# Altium PCB peripheral.PCBDOC (part 2 of 4)
Units mil, origin at the board's own origin, x right, y up, seen from the top; angles counter-clockwise.
Board outline 7500 x 3963 mil, 6 copper layers (Top Layer, Internal Plane 1, MidLayer1, MidLayer2, Internal Plane 2, Bottom Layer); 212 components, 387 nets, 1676 pads, 795 vias.
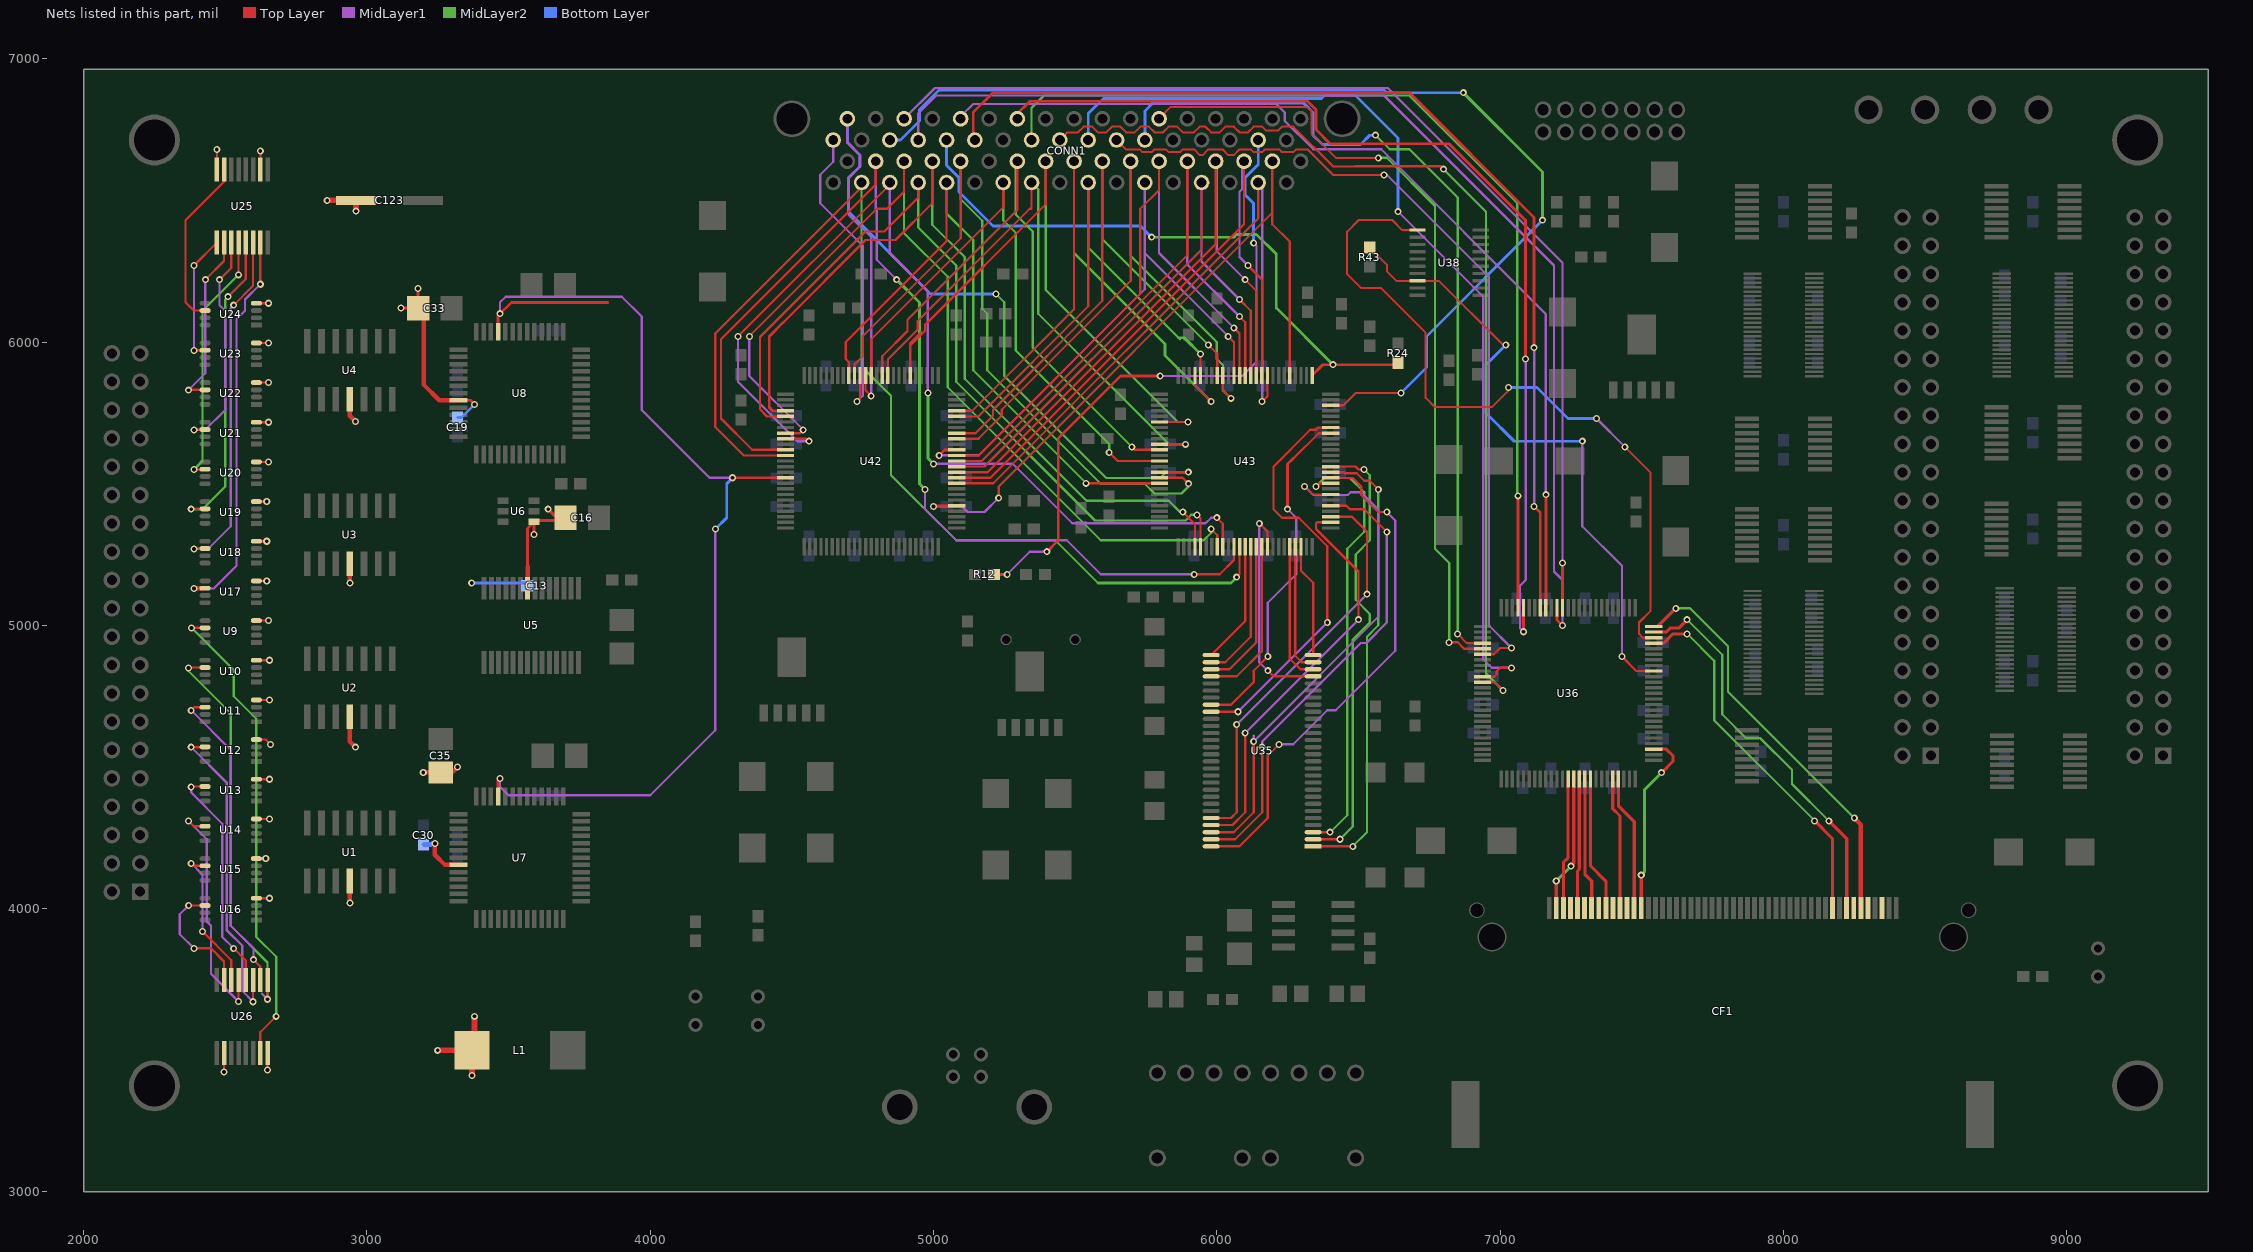
[diagram p6: the nets of this part, all layers, seen from the top]

## Via types
v1: diameter 25, hole 13.5, Top Layer to Bottom Layer, 795 vias

## Nets (pads, with @x,y where several pads share a name; then routed paths per layer and width w, separated by ;. In a path a pad name is that pad's centre, name@x,y a point inside that pad or via, vN(x,y) a via of type N, cw(c..) or ccw(c..) an arc to the next point about the centre after c; other vN are vias at no path point) (continued)
AVDD: C13.2 C16.1 C19.2 C30.2 C33.1 C35.1 C123.1 L1.2 U1.4 U2.4 U3.4 U4.4 U5.22 U6.4 U7.8 U8.8 U9.4 U10.4 U11.4 U12.4 U13.4 U14.4 U15.4 U16.4 U17.4 U18.4 U19.4 U20.4 U21.4 U22.4 U23.4 U24.4 U25.10 U25.16 U26.10 U26.16 | length 3415.6
  Top Layer w7: U25.16@2470.43,6608.94 v1(2470.43,6679.57) ; v1(2496.02,3423.98) U26.10@2496.02,3491.06 ; U25.10@2623.98,6608.94 v1(2623.98,6673.98) ; v1(2649.57,3430.43) U26.16@2649.57,3491.06
  Top Layer w8: U16.4@2610,4036.77 v1(2656.77,4036.77) ; U15.4@2610,4176.77 v1(2643.23,4176.77) ; U14.4@2610,4316.77 v1(2656.77,4316.77) ; U13.4@2610,4456.77 v1(2656.77,4456.77) ; U12.4@2610,4596.77 2643.23,4596.77 v1(2660,4580) ; U11.4@2610,4736.77 v1(2656.77,4736.77) ; U10.4@2610,4876.77 v1(2656.77,4876.77) ; U9.4@2610,5016.77 v1(2653.23,5016.77) ; U17.4@2610,5156.77 v1(2646.77,5156.77) ; U18.4@2610,5296.77 v1(2646.77,5296.77) ; U19.4@2610,5436.77 v1(2646.77,5436.77) ; U20.4@2610,5576.77 v1(2653.23,5576.77) ; U21.4@2610,5716.77 v1(2653.23,5716.77) ; U22.4@2610,5856.77 v1(2653.23,5856.77) ; U23.4@2610,5996.77 v1(2653.23,5996.77) ; U24.4@2610,6136.77 v1(2653.23,6136.77)
  Top Layer w10: v1(3120,6120) C33.1@3180.94,6120 v1(3180.94,6189.06) ; U8.8@3323.46,5794.41 3365.59,5794.41 v1(3380,5780) ; 3567.2,5207.2 3567.2,5342.17 U6.4@3590.24,5365.2 v1(3590.24,5320.24) ; U6.4@3580,5360 3590,5370 3660,5370 C16.1@3670,5380 ; v1(3640,5410) C16.1@3670,5380 ; C16.1@3700.94,5380 C16.1@3670,5380
  Top Layer w16: v1(2940,4020) U1.4@2940,4097.64 ; U2.4@2940,4677.64 2940,4590 v1(2960,4570) ; v1(2940,5150) U3.4@2940,5217.64 ; U4.4@2940,5797.64 2940,5740 v1(2960,5720) ; C33.1@3190,6100 3200,6090 3200,5850 3255.59,5794.41 U8.8@3323.46,5794.41 ; v1(3199.06,4480.94) 3300.94,4480.94 v1(3320,4500) ; v1(3240,4230) 3240,4190 3275.59,4154.41 U7.8@3323.46,4154.41 ; U5.22@3567.2,5130.91 3567.2,5207.2
  Top Layer w20: v1(2860,6500) C123.1@2961.89,6500 v1(2961.89,6461.89) ; v1(3250,3500) L1.2@3371,3500 v1(3371,3411) ; L1.2@3380,3510 v1(3380,3620)
  Bottom Layer w10: C19.2@3320,5733.46 3333.46,5733.46 v1(3380,5780) ; v1(3370,5150) 3570,5150 C13.2@3570,5140
  Bottom Layer w16: C30.2@3200,4226.54 3226.54,4226.54 3230,4230 v1(3240,4230)
BCLK: CONN1.57 U36.79 | length 3071.7
  Top Layer w7: v1(6850,4970) 6882.83,4937.17 U36.79@6937.83,4937.17
  MidLayer2 w8: v1(6560,6730) 6610,6680 6680,6680 6850,6510 v1(6850,4970)
  Bottom Layer w10: CONN1.57@5746,6713 5746,6816 5773,6843 6307,6843 6340,6810 6340,6730 6372.96,6697.04 6507.04,6697.04 6540,6730 v1(6560,6730)
BDIN: CONN1.51 U36.86 | length 3557
  Top Layer w7: CONN1.51@5446,6713 5473,6740 5510,6740 5530,6760 5560,6760 5580,6740 5610,6740 5630,6760 5660,6760 5680,6740 5710,6740 5730,6760 5760,6760 5780,6740 5810,6740 5830,6760 5860,6760 5880,6740 5919.26,6740 5939.26,6760 5960,6760 5980,6740 6010,6740 6030,6760 6060,6760 6080,6740 6110,6740 6130,6760 6160,6760 6172.94,6747.06 6217.06,6747.06 6230,6760 6270,6760 6410,6620 6490,6620
  Top Layer w8: 6490,6620 6790,6620 v1(6800,6610) ; U36.86@6937.83,4799.37 6980.63,4799.37 v1(7010,4770)
  MidLayer2 w8: v1(6800,6610) 6950,6460 6950,4830 v1(7010,4770)
BDONE: CONN1.58 U36.80 | length 2870
  Top Layer w7: CONN1.58@5796,6788 5838,6830 6318.08,6830 6334.5,6813.58 6334.5,6735.5 6420,6650 v1(6570,6650)
  Top Layer w8: v1(6820,4940) 6850,4940 6872.52,4917.48 U36.80@6937.83,4917.48
  MidLayer2 w8: v1(6570,6650) 6600,6650 6770,6480 6770,5270 6820,5220 v1(6820,4940)
BINIT: CONN1.53 U36.85 | length 3473.2
  Top Layer w8: U36.85@6937.83,4819.06 6979.06,4819.06 6987.85,4827.85 6987.85,4837.85 7000,4850 v1(7040,4850)
  MidLayer1 w8: v1(6640,6460) 6940,6160 6940,4880 6970,4850 v1(7040,4850)
  Bottom Layer w10: CONN1.53@5546,6713 5546,6806 5600,6860 6370,6860 6380,6870 6490,6870 6640,6720 v1(6640,6460)
BIO0: CONN1.40 U36.64 | length 3842.7
  Top Layer w10: 7220,5110 v1(7220,5220) ; U36.64@7220.31,5062.17 7220.31,5110
  MidLayer1 w8: CONN1.40@4896,6788 5005,6897 6603,6897 7220.31,6279.69 ; v1@7220,5220.31 7220,6280
BIO1: CONN1.41 U36.65 | length 3964.7
  Top Layer w10: U36.65@7200.63,5062.17 7200.63,5019.37 v1(7220,5000)
  MidLayer1 w8: CONN1.41@4946,6713 4946,6806 5010,6870 6590,6870 7190,6270 7190,5190 7220,5160 v1(7220,5000)
BIO2: CONN1.44 U36.67 | length 3440.8
  Top Layer w10: U36.67@7161.26,5062.17 v1(7161.26,5461.26)
  MidLayer1 w8: CONN1.44@5100,6800 5140,6840 6210,6840 6240,6810 6240,6780 6340,6680 6580,6680 7161.26,6098.74 v1(7161.26,5461.26) v1@7160,5462.52
BIO3: CONN1.45 U36.68 | length 3677.5
  Top Layer w10: CONN1.45@5146,6713 5140,6719 5140,6810 5210,6880 6680,6880 7120,6440 v1(7120,5980) ; v1(7120,5420) 7141.57,5398.43 U36.68@7141.57,5062.17
  MidLayer1 w8: v1(7120,5420) v1(7120,5980)
BIO4: CONN1.48 U36.71 | length 3586.4
  Top Layer w10: CONN1.48@5290,6800 5340,6850 6320,6850 6350,6820 6350,6750 6400,6700 6820,6700 7090,6430 v1(7090,5940) ; v1(7082.52,4977.48) U36.71@7082.52,5062.17
  MidLayer1 w8: v1(7082.52,4977.48) 7070,4990 7070,5140 7090,5160 v1(7090,5940)
BIO5: CONN1.49 U36.72 | length 3431.6
  Top Layer w10: U36.72@7062.83,5062.17 v1(7062.83,5457.17)
  MidLayer2 w8: CONN1.49@5346,6713 5346,6826 5390,6870 6680,6870 7060,6490 7060,5460 v1(7062.83,5457.17)
BPROG: CONN1.55 U36.81 | length 3044.8
  Top Layer w7: CONN1.55@5646,6713 5679,6680 5727.16,6680 5737.16,6670 5770,6670 5780,6680 5820,6680 5830,6670 5870,6670 5880,6680 5920,6680 5940,6660 5950,6660 5970,6680 6020,6680 6040,6660 6060,6660 6080,6680 6120,6680 6130,6670 6160,6670 6170,6680 6220,6680 6230,6670 6270,6670 6280,6680 6320,6680 6410,6590 v1(6590,6590)
  Top Layer w8: U36.81@6937.83,4897.8 6977.8,4897.8 7000,4920 v1(7040,4920)
  MidLayer1 w8: v1@6580,6590 6600,6590 6960,6230 6960,5000 v1(7040,4920)
CCLK: CONN1.52 R25.1 | length 1516.9
  Top Layer w10: v1(6260,6400) 6540,6120 R25.1@6540,6053.46
  MidLayer2 w10: CONN1.52@5496,6788 5496,6693.16 5519.16,6670 5570,6670 5590,6690 5610,6690 5640,6660 5650,6660 5670,6680 5720,6680 5750,6650 5750,6620 5800,6570 5800,6530 5840,6490 6170,6490 v1(6260,6400)
CCLK: CONN1.65 R12.1 | length 2266.7
  Top Layer w10: R12.1@5213.46,5180 v1(5260,5180) ; v1(5400,5260) 5440,5300 5440,5660 5660,5880 v1(5800,5880)
  MidLayer1 w8: v1(5260,5180) 5340,5260 v1(5400,5260) ; v1(5800,5880) 6090,5880 6140,5930 6140,6340 v1(6130,6350)
  Bottom Layer w10: v1(6130,6350) 6130,6490 6100,6520 6100,6580 6146,6626 CONN1.65@6146,6713
CD1: CF1.26 U36.14 | length 481
  Top Layer w11: CF1.26@7198.13,4002.36 v1(7198.13,4098.13) ; v1(7250,4150) 7259.69,4159.69 U36.14@7259.69,4457.83
  MidLayer2 w10: v1(7198.13,4098.13) v1(7250,4150)
CE1: CF1.7 U36.22 | length 478.7
  Top Layer w11: U36.22@7417.17,4457.83 7417.17,4362.83 7473.13,4306.87 CF1.7@7473.13,4002.36
CE2: CF1.32 U36.28 | length 661.4
  Top Layer w11: CF1.32@7498.13,4002.36 v1(7498.13,4118.13) ; U36.28@7542.17,4563.15 7586.85,4563.15 7610,4540 7610,4520 v1(7570,4480)
  MidLayer2 w10: v1(7498.13,4118.13) 7510,4130 7510,4420 v1(7570,4480)
CTL0: U35.36 U43.43 | length 1224.4
  Top Layer w8: U35.36@5980,4720 6050,4720 6130,4800 6130,4840 v1(6180,4890) ; 6270.56,5589.44 6359.54,5678.43 U43.43@6402.17,5678.43
  Top Layer w10: v1(6250,5410) 6250,5570 6270,5590
  MidLayer1 w8: v1(6180,4890) 6180,5080 6280,5180 6280,5380 v1(6250,5410)
CTL1: U35.37 U43.44 | length 1463
  Top Layer w8: U35.37@5980,4695 v1(6075,4695) ; v1(6390,5010) 6390,5278.79 6288.79,5380 6230,5380 6200,5410 6200,5560 6330,5690 6350,5690 6358.11,5698.11 U43.44@6402.17,5698.11
  MidLayer1 w8: v1(6075,4695) v1(6390,5010)
D0: CF1.21 U36.47 | length 1311.6
  Top Layer w11: U36.47@7542.17,4937.17 7577.17,4937.17 7610,4970 v1(7660,4970) ; v1(8110,4310) 8173.13,4246.87 CF1.21@8173.13,4002.36
  MidLayer2 w8: v1(7660,4970) 7755.39,4874.61 7755.39,4664.61 v1(8110,4310)
D1: CF1.22 U36.49 | length 1416
  Top Layer w11: U36.49@7542.17,4976.54 7586.54,4976.54 7600,4990 7630,4990 v1(7660,5020) ; v1(8160,4310) 8223.13,4246.87 CF1.22@8223.13,4002.36
  MidLayer2 w8: v1(7660,5020) 7783.46,4896.54 7783.46,4686.54 7867.22,4602.78 7917.22,4602.78 8030,4490 8030,4440 v1(8160,4310)
D2: CF1.23 U36.50 | length 1461.7
  Top Layer w11: U36.50@7542.17,4996.22 7556.22,4996.22 v1(7620,5060)
  Top Layer w16: v1(8250,4320) 8273.13,4296.87 CF1.23@8273.13,4002.36
  MidLayer2 w8: v1(7620,5060) 7670,5060 7804.16,4925.84 7804.16,4765.84 v1(8250,4320)
D3: CF1.2 U36.13 | length 462.5
  Top Layer w11: CF1.2@7223.13,4002.36 7223.13,4163.13 7240,4180 U36.13@7240,4457.83
D4: CF1.3 U36.15 | length 458.1
  Top Layer w11: CF1.3@7273.13,4002.36 7273.13,4133.13 7279.37,4139.37 U36.15@7279.37,4457.83
D5: CF1.4 U36.16 | length 465.4
  Top Layer w11: U36.16@7299.06,4457.83 7299.06,4120.94 7323.13,4096.87 CF1.4@7323.13,4002.36
D6: CF1.5 U36.17 | length 478
  Top Layer w11: U36.17@7318.74,4457.83 7318.74,4151.26 7373.13,4096.87 CF1.5@7373.13,4002.36
D7: CF1.6 U36.21 | length 466.1
  Top Layer w11: U36.21@7397.48,4457.83 7397.48,4352.52 7423.13,4326.87 CF1.6@7423.13,4002.36
D8: CF1.47
D9: CF1.48
D10: CF1.49
D11: CF1.27
D12: CF1.28
D13: CF1.29
D14: CF1.30
D15: CF1.31
DACCLK: U7.49 U8.49 U42.16 | length 3857.1
  Top Layer w10: U7.49@3463.23,4396.54 3463.23,4453.23 v1(3470,4460) ; U8.49@3463.23,6036.54 3463.23,6093.23 3510,6140 3850,6140 ; v1(4290.94,5520.94) U42.16@4477.83,5520.94
  MidLayer1 w8: v1(3470,4460) 3470,4430 3500,4400 4000,4400 4230,4630 v1(4230,5340) ; v1(3470,6100) 3470,6140 3490,6160 3900,6160 3970,6090 3970,5760 4209.06,5520.94 v1(4290.94,5520.94)
  Bottom Layer w10: v1(4230,5340) 4270,5380 4270,5500 v1(4290.94,5520.94)
DIN: CONN1.63 U42.48 | length 2246.3
  Top Layer w8: U42.48@4976.85,5277.83 4976.85,5313.15 4940,5350 4940,5740 5040,5840 5040,5860 5150,5970 5150,6030 5160,6040 5300,6040 v1(5320,6060)
  MidLayer2 w10: v1(5860,6400) v1(6040,6400)
  Bottom Layer w10: v1(5320,6060) 5420,6060 5650,6290 5750,6290 v1(5860,6400) ; v1(6040,6400) 6000,6440 6000,6580 6046,6626 CONN1.63@6046,6713
DIN: CONN1.39 U43.48 | length 3773.7
  Top Layer w8: U43.48@6402.17,5776.85 6446.85,5776.85 6490,5820 v1(6650,5820)
  MidLayer2 w10: v1(6870,6880) 7150,6600 v1(7150,6430)
  Bottom Layer w10: CONN1.39@4846,6713 4883,6713 4950,6780 4950,6820 5020,6890 6590,6890 6600,6880 v1(6870,6880) ; v1(6650,5820) 6740,5910 6740,6020 v1(7150,6430)
DONE: CONN1.66 R11.1 U42.51 | length 2967.5
  Top Layer w8: U42.51@5082.17,5343.78 5082.17,5051.3 R11.1@5120,5013.46 v1(5423.46,5013.46)
  MidLayer1 w8: v1(5470,5950) 5680,6160 5680,6510 5690,6520 5690,6570 5740,6620 5740,6650 5770,6680 5820,6680 5830,6670 5870,6670 5880,6680 5926.17,6680 5936.17,6670 5960,6670 5970,6680 6026.17,6680 6036.17,6670 6070,6670 6100,6700 6100,6730 6160,6790 CONN1.66@6190,6790
  Bottom Layer w10: v1(5423.46,5013.46) 5470,5060 v1(5470,5950)
DONE: CONN1.43 R24.1 U43.51 | length 2207.1
  Top Layer w10: U43.51@6336.22,5882.17 6374.06,5920 6620,5920 R24.1@6630,5930
  MidLayer2 w10: v1(5770,6370) 6060,6370 6070,6380 6140,6380 6210,6310 6210,6120 v1(6410,5920)
  Bottom Layer w10: CONN1.43@5046,6713 5046,6624 5090,6580 5090,6530 5210,6410 5730,6410 v1(5770,6370)
DSEL0: U16.6 U26.7 | length 432.7
  Top Layer w8: v1(2371.18,4011.18) U16.6@2428.9,4011.18 ; v1(2390,3860) 2450,3860 2496.02,3813.98 U26.7@2496.02,3748.94
  MidLayer1 w8: v1(2371.18,4011.18) 2340,3980 2340,3910 v1(2390,3860)
DSEL1: U15.6 U26.6 | length 522.3
  Top Layer w8: v1(2380,4160) 2388.82,4151.18 U15.6@2428.9,4151.18 ; v1(2420,3920) 2521.61,3818.39 U26.6@2521.61,3748.94
  MidLayer1 w8: v1(2380,4160) 2420,4120 v1(2420,3920)
DSEL2: U14.6 U26.5 | length 853.4
  Top Layer w8: v1(2370,4310) 2388.82,4291.18 U14.6@2428.9,4291.18 ; v1(2547.21,3672.8) U26.5@2547.21,3748.94
  MidLayer1 w8: v1(2370,4310) 2435,4245 2435,3955 2450,3940 2450,3770 v1(2547.21,3672.8)
DSEL3: U13.6 U26.4 | length 810.3
  Top Layer w8: v1(2380,4430) 2381.18,4431.18 U13.6@2428.9,4431.18 ; v1(2530,3860) 2572.8,3817.21 U26.4@2572.8,3748.94
  MidLayer1 w8: v1(2380,4430) 2380,4410 2490,4300 2490,3900 v1(2530,3860)
DSEL4: U12.6 U26.3 | length 1115.6
  Top Layer w8: v1(2380,4570) 2427.72,4570 U12.6@2428.9,4571.18 ; v1(2598.39,3671.61) U26.3@2598.39,3748.94
  MidLayer1 w8: v1(2380,4570) 2505,4445 2505,3925 2560,3870 2560,3710 v1(2598.39,3671.61)
DSEL5: U11.6 U26.2 | length 1105.6
  Top Layer w8: v1(2380,4700) 2391.18,4711.18 U11.6@2428.9,4711.18 ; v1(2600,3820) 2623.98,3796.02 U26.2@2623.98,3748.94
  MidLayer1 w8: v1(2380,4700) 2520,4560 2520,3940 2600,3860 v1(2600,3820)
DSEL6: U10.6 U26.1 | length 1440.9
  Top Layer w8: v1(2370,4850) 2371.18,4851.18 U10.6@2428.9,4851.18 ; v1(2649.57,3680.43) U26.1@2649.57,3748.94
  MidLayer1 w8: 2630,3700 v1(2649.57,3680.43)
  MidLayer2 w8: v1(2370,4850) 2370,4840 2520,4690 2520,3940 2649.57,3810.43 v1(2649.57,3680.43)
DSEL7: U9.6 U26.15 | length 1694.8
  Top Layer w8: v1(2381.18,4991.18) U9.6@2428.9,4991.18 ; U26.15@2623.98,3491.06 2623.98,3563.98 v1(2680,3620)
  MidLayer2 w8: v1(2381.18,4991.18) 2530,4842.36 2530,4750 2610,4670 2610,3900 2680,3830 v1(2680,3620)
DSEL8: U17.6 U25.7 | length 1398.4
  Top Layer w8: v1(2623.98,6203.98) U25.7@2623.98,6351.06
  Top Layer w16: v1(2390,5130) 2391.18,5131.18 U17.6@2428.9,5131.18
  MidLayer1 w8: v1(2390,5130) 2460,5130 2540,5210 2540,6080 2570,6110 2570,6150 v1(2623.98,6203.98)
DSEL9: U18.6 U25.6 | length 1246.7
  Top Layer w8: v1(2390,5270) U18.6@2440,5270 ; v1(2530,6130) 2598.39,6198.39 U25.6@2598.39,6351.06
  MidLayer1 w8: v1(2390,5270) 2440,5270 2520,5350 2520,6120 v1(2530,6130)
DSEL10: U19.6 U25.5 | length 1093.7
  Top Layer w8: v1(2380,5410) 2381.18,5411.18 U19.6@2428.9,5411.18 ; v1(2510,6160) 2572.8,6222.8 U25.5@2572.8,6351.06
  MidLayer2 w8: v1(2380,5410) 2420,5410 2500,5490 2500,6150 v1(2510,6160)
DSEL11: U20.6 U25.4 | length 903.9
  Top Layer w8: v1(2390,5550) U20.6@2427.72,5550 ; v1(2547.21,6237.21) U25.4@2547.21,6351.06
  MidLayer2 w8: v1(2390,5550) 2420,5580 2420,6110 v1(2547.21,6237.21)
DSEL12: U21.6 U25.3 | length 795
  Top Layer w8: v1(2390,5690) 2391.18,5691.18 U21.6@2428.9,5691.18 ; v1(2480,6220) 2521.61,6261.61 U25.3@2521.61,6351.06
  MidLayer1 w8: v1(2390,5690) 2430,5690 2500,5760 2500,6110 2480,6130 v1(2480,6220)
DSEL13: U22.6 U25.2 | length 632.7
  Top Layer w8: v1(2370,5830) 2371.18,5831.18 U22.6@2428.9,5831.18 ; v1(2430,6220) 2496.02,6286.02 U25.2@2496.02,6351.06
  MidLayer1 w8: v1(2370,5830) 2430,5890 v1(2430,6220)
DSEL14: U23.6 U25.1 | length 453.8
  Top Layer w8: v1(2390,5970) 2391.18,5971.18 U23.6@2428.9,5971.18 ; v1(2390,6270) 2470.43,6350.43 U25.1@2470.43,6351.06
  MidLayer1 w8: v1(2390,5970) v1(2390,6270)
DSEL15: U24.6 U25.15 | length 606.1
  Top Layer w8: U24.6@2428.9,6111.18 2388.82,6111.18 2360,6140 2360,6430 2496.02,6566.02 U25.15@2496.02,6608.94
EADDR0: CONN1.10 U42.91 U43.91 | length 2717.1
  Top Layer w8: U42.91@4720.94,5882.17 4720.94,5920.94 4750,5950 4750,6020 5096,6366 CONN1.10@5096,6638 ; U43.91@5797.83,5520.94 5879.06,5520.94 v1(5900,5500)
  MidLayer2 w8: CONN1.10@5096,6638 5096,6504 5172.15,6427.85 5172.15,6117.85 5190,6100 5190,5900 5590,5500 5745.85,5500 5780.24,5465.6 5875.6,5465.6 5900,5490 v1@5900,5508.11
EADDR1: CONN1.9 U42.92 U43.92 | length 2357.9
  Top Layer w8: U42.92@4701.26,5882.17 4701.26,5928.74 4690,5940 4690,6000 5046,6356 CONN1.9@5046,6563 ; v1(5538.74,5501.26) U43.92@5797.83,5501.26
  MidLayer2 w8: CONN1.9@5046,6563 5046,6454 5140,6360 5140,5900 v1(5538.74,5501.26)
EADDR2: CONN1.8 U42.4 U43.4 | length 3151.6
  Top Layer w8: 4468.34,6068.34 4760,6360 4866,6360 4996,6490 CONN1.8@4996,6638 ; v1(5880,5400) 5922.83,5357.17 U43.4@5922.83,5277.83
  Top Layer w10: 4468.34,6068.34 4420,6020 4420,5770 4432.83,5757.17 U42.4@4477.83,5757.17
  MidLayer2 w8: CONN1.8@4996,6638 4996,6414 5110,6300 5110,5870 5540,5440 5830,5440 5870,5400 v1(5880,5400)
EADDR3: CONN1.7 U42.5 U43.5 | length 3108.2
  Top Layer w8: U42.5@4477.83,5737.48 4412.52,5737.48 4387.61,5762.39 4387.61,6017.61 4760,6390 4826,6390 4946,6510 CONN1.7@4946,6563 ; v1(5930,5390) 5942.52,5377.48 U43.5@5942.52,5277.83
  MidLayer2 w8: CONN1.7@4946,6563 4946,6404 5080,6270 5080,5860 5570,5370 5890,5370 5910,5390 v1(5930,5390)
EADDR4: CONN1.6 U42.8 U43.8 | length 3451.7
  Top Layer w8: v1(4350,6020) 4800,6470 4836,6470 4896,6530 CONN1.6@4896,6638 ; U42.8@4477.83,5678.43 4528.43,5678.43 v1(4540,5690) ; v1(5980,5340) 6001.57,5318.43 U43.8@6001.57,5277.83
  MidLayer1 w8: v1(4350,6020) 4350,5880 v1(4540,5690)
  MidLayer2 w8: CONN1.6@4896,6638 4896,6384 5050,6230 5050,5840 5590,5300 5953.15,5300 5980,5326.85 v1(5980,5340)
EADDR5: CONN1.5 U42.9 U43.9 | length 3614.3
  Top Layer w8: v1(4310,6020) 4840,6550 4846,6550 CONN1.5@4846,6563 ; U42.9@4477.83,5658.74 4551.26,5658.74 v1(4560,5650) ; v1(6000,5380) 6021.26,5358.74 U43.9@6021.26,5277.83
  MidLayer1 w8: v1(4310,6020) 4310,5860 4520,5650 v1(4560,5650) ; CONN1.5@4846,6563 4846,6314 4980,6180 v1(4980,5820) ; v1(5000,5570) 5280,5570 5490,5360 5960,5360 5980,5380 v1(6000,5380)
  MidLayer2 w10: v1(4980,5820) 4980,5590 v1(5000,5570)
EADDR6: CONN1.4 U42.11 U43.11 | length 3962
  Top Layer w8: U42.11@4477.83,5619.37 4360.63,5619.37 4250,5730 4250,6010 4796,6556 CONN1.4@4796,6638 ; v1(5920,5180) 6010,5180 6060.63,5230.63 U43.11@6060.63,5277.83
  MidLayer1 w8: CONN1.4@4796,6638 4796,6470 4800,6466 4800,6290 v1(4870,6220) ; v1(4970,5480) 4970,5410 5080,5300 5470,5300 5590,5180 v1(5920,5180)
  MidLayer2 w10: v1(4870,6220) 4950,6140 4950,5500 v1(4970,5480)
EADDR7: CONN1.3 U42.12 U43.12 | length 3940
  Top Layer w8: U42.12@4477.83,5599.69 4330.31,5599.69 4230,5700 4230,6030 4746,6546 CONN1.3@4746,6563 ; v1(6070,5170) 6080.31,5180.31 U43.12@6080.31,5277.83
  MidLayer2 w8: CONN1.3@4746,6563 4746,5914 4850,5810 4850,5530 5080,5300 5430,5300 5580,5150
  MidLayer2 w10: 5580,5150 6050,5150 v1(6070,5170)
EDATA0: CONN1.32 U42.55 U43.55 | length 2529.6
  Top Layer w8: v1(5000,5420) 5002.52,5422.52 U42.55@5082.17,5422.52 ; v1(5230,5450) 5230,5490 6196,6456 ; CONN1.32@6196,6638 6196,6416 6257.48,6354.52 U43.55@6257.48,5882.17
  MidLayer1 w8: v1(5000,5420) 5100,5420 5120,5400 5180,5400 v1(5230,5450)
EDATA1: CONN1.31 U42.59 U43.59 | length 2456.7
  Top Layer w8: U42.59@5082.17,5501.26 5211.26,5501.26 6146,6436 CONN1.31@6146,6563 ; v1(6160,5790) 6178.74,5808.74 U43.59@6178.74,5882.17
  MidLayer1 w8: CONN1.31@6146,6563 6160,6549 v1(6160,5790)
EDATA2: CONN1.30 U42.60 U43.60 | length 2403.8
  Top Layer w8: U42.60@5082.17,5520.94 5200.94,5520.94 6096,6416 CONN1.30@6096,6638 ; v1(6110,6270) 6159.06,6220.94 U43.60@6159.06,5882.17
  MidLayer1 w8: CONN1.30@6096,6638 6096,6636 6090,6630 6090,6540 6080,6530 6080,6300 v1(6110,6270) ; CONN1.30@6100,6638 CONN1.30@6100,6640
EDATA3: CONN1.28 U42.61 U43.61 | length 2365
  Top Layer w8: U42.61@5082.17,5540.63 5190.63,5540.63 5996,6346 CONN1.28@5996,6638 ; v1(6100,6220) 6139.37,6180.63 U43.61@6139.37,5882.17
  MidLayer1 w8: CONN1.28@6000,6650 6000,6320 v1(6100,6220)
EDATA4: CONN1.27 U42.62 U43.62 | length 2170.8
  Top Layer w8: U42.62@5082.17,5560.32 5180.32,5560.32 5946,6326 CONN1.27@5946,6563 ; v1(6080,6150) 6119.69,6110.32 U43.62@6119.69,5882.17
  MidLayer1 w8: CONN1.27@5946,6563 5946,6284 v1(6080,6150)
EDATA5: CONN1.26 U42.63 U43.63 | length 2286.9
  Top Layer w8: U42.63@5082.17,5580 5170,5580 5896,6306 CONN1.26@5896,6638 ; v1(6080,6090) 6100,6070 U43.63@6100,5882.17
  MidLayer1 w8: CONN1.26@5896,6638 5896,6274 v1(6080,6090)
EDATA6: CONN1.24 U42.64 U43.64 | length 2253
  Top Layer w8: U42.64@5082.17,5599.69 5159.69,5599.69 5730,6170 5730,6470 5796,6536 CONN1.24@5796,6638 ; v1(6060,6050) 6080.31,6029.69 U43.64@6080.31,5882.17
  MidLayer1 w8: CONN1.24@5796,6638 5796,6314 v1(6060,6050)
EDATA7: CONN1.23 U42.65 U43.65 | length 1978.1
  Top Layer w8: v1(6040,6020) 6060.63,5999.37 U43.65@6060.63,5882.17
  Top Layer w10: v1(5020,5600) 5039.37,5619.37 U42.65@5082.17,5619.37
  MidLayer1 w8: v1(5020,5600) 5160,5600 5746,6186 CONN1.23@5746,6563 ; 5746,6314 v1(6040,6020)
EDATA8: CONN1.22 U42.67 U43.67 | length 2356
  Top Layer w8: U42.67@5082.17,5658.74 5160,5658.74 5160,5660 5240.69,5740.69 5240.69,5760.69 5696,6216 CONN1.22@5696,6638 ; U43.67@6021.26,5882.17 6021.26,5830.01 v1(6050,5801.27)
  MidLayer2 w8: CONN1.22@5696,6638 5696,6304 6000,6000 6000,5940 6022.15,5917.85 6022.15,5827.85 6048.73,5801.27 v1(6050,5801.27)
EDATA9: CONN1.20 U42.68 U43.68 | length 2135.1
  Top Layer w8: U42.68@5082.17,5678.43 5148.43,5678.43 5210,5740 5210,5760 5596,6146 CONN1.20@5596,6638 ; v1(5970,5990) 6001.57,5958.43 U43.68@6001.57,5882.17
  MidLayer2 w8: CONN1.20@5596,6638 5596,6364 v1(5970,5990)
EDATA10: CONN1.19 U42.71 U43.71 | length 1926
  Top Layer w8: U42.71@5082.17,5737.48 5157.48,5737.48 5546,6126 CONN1.19@5546,6563 ; U43.71@5942.52,5882.17 v1(5942.52,5957.48)
  MidLayer2 w8: CONN1.19@5546,6563 5546,6334 5870,6010
  MidLayer2 w10: 5864.76,6015.24 5884.76,6015.24 v1(5942.52,5957.48)
EDATA11: CONN1.18 U42.72 U43.72 | length 2248.8
  Top Layer w8: U42.72@5082.17,5757.17 5137.17,5757.17 5496,6116 CONN1.18@5496,6638 ; U43.72@5922.83,5882.17 5922.83,5847.17 v1(5980,5790)
  MidLayer2 w8: CONN1.18@5496,6638 5496,6314 5817.16,5992.84
  MidLayer2 w10: 5817.16,5992.84 5817.16,5952.84 v1(5980,5790)
EDATA12: CONN1.16 U42.81 U43.81 | length 2264.7
  Top Layer w8: U42.81@4917.8,5882.17 4917.8,5996.58 4955.39,6034.17 ; 4917.8,5987.8 4970,6040 4970,6060 5396,6486 CONN1.16@5396,6638 ; U43.81@5797.83,5717.8 v1(5897.8,5717.8)
  MidLayer2 w8: CONN1.16@5396,6638 5396,6184 5862.2,5717.8 v1(5897.8,5717.8)
EDATA13: CONN1.15 U42.85 U43.85 | length 2167.7
  Top Layer w8: U42.85@4839.06,5882.17 4839.06,5939.06 ; 4840,5940 4944.59,6044.59 4944.59,6074.59 5340,6470 5346,6470 CONN1.15@5346,6563 ; U43.85@5797.83,5639.06 v1(5889.06,5639.06)
  MidLayer2 w8: CONN1.15@5346,6563 5370,6539 5370,6100 5830,5640 5830,5639.06 v1(5889.06,5639.06)
EDATA14: CONN1.14 U42.86 U43.86 | length 2235.8
  Top Layer w8: U42.86@4819.37,5882.17 4819.37,5949.37 4908.61,6038.61 4908.61,6078.61 5296,6466 CONN1.14@5296,6638 ; v1(5700,5630) 5710.63,5619.37 U43.86@5797.83,5619.37
  MidLayer2 w8: CONN1.14@5296,6638 5290,6632 5290,6450 5350,6390 5350,5980 v1(5700,5630)
EDATA15: CONN1.13 U42.88 U43.88 | length 2172
  Top Layer w8: U42.88@4780,5882.17 4780,6010 5246,6476 CONN1.13@5246,6563 ; v1(5620,5610) 5650,5580 U43.88@5797.83,5580
  MidLayer2 w8: CONN1.13@5246,6563 5246,6430 5290,6386 5290,5970 5620,5640 v1(5620,5610)
EVENT: CONN1.36 U42.89 U43.90 | length 3341.1
  Top Layer w8: U42.89@4760.32,5882.17 4760.32,5829.69 v1(4780,5810) ; U43.90@5797.83,5540.63 v1(5899.37,5540.63)
  MidLayer1 w8: CONN1.36@4696,6788 4696,6704 4740,6660 4740,6620 4700,6580 4700,6450 4780,6370 v1(4780,5810) ; v1(5899.37,5540.63) v1@5900,5540
  MidLayer2 w8: v1(5220,6170) 5250,6140 5250,5880 5610,5520 5800,5520 5820.63,5540.63 v1(5899.37,5540.63)
  Bottom Layer w10: CONN1.36@4696,6788 4696,6704 4740,6660 4740,6620 4700,6580 4700,6460 4990,6170 v1(5220,6170)
EVENTCE: CONN1.35 U42.90 | length 1109
  Top Layer w8: v1(4730,5790) 4740.63,5800.63 U42.90@4740.63,5882.17
  MidLayer1 w8: CONN1.35@4646,6713 4646,6636 4600,6590 4600,6490 4750,6340 4750,5810 v1(4730,5790)
FD0: U35.25 U43.17 | length 794.8
  Top Layer w8: v1(6150,5360) 6178.74,5331.26 U43.17@6178.74,5277.83 ; v1(6180,4840) 6200,4820 U35.25@6340,4820
  MidLayer1 w8: v1(6150,5360) 6150,4870 v1(6180,4840)
FD1: U35.26 U43.21 | length 493.4
  Top Layer w8: U43.21@6257.48,5277.83 6257.48,4882.52 6295,4845 U35.26@6340,4845
FD2: U35.27 U43.22 | length 457.3
  Top Layer w8: U43.22@6277.17,5277.83 6277.17,4892.83 6300,4870 U35.27@6340,4870
FD3: U35.28 U43.23 | length 400.7
  Top Layer w8: U43.23@6296.85,5277.83 6296.85,5193.15 6340,5150 U35.28@6340,4895
FD4: U35.29 U43.13 | length 432.5
  Top Layer w8: U35.29@5980,4895 6100,5015 U43.13@6100,5277.83
FD5: U35.30 U43.14 | length 485
  Top Layer w8: U35.30@5990,4870 6030,4870 6119.69,4959.69 U43.14@6119.69,5277.83
FD6: U35.31 U43.15 | length 536.9
  Top Layer w8: U35.31@5980,4845 6045,4845 6139.37,4939.37 U43.15@6139.37,5277.83
FD7: U35.32 U43.16 | length 584.7
  Top Layer w8: U35.32@5980,4820 6070,4820 6159.06,4909.06 U43.16@6159.06,5277.83
FD8: U35.52 U43.28 | length 1428.7
  Top Layer w8: U35.52@5980,4320 6050,4320 6070,4340 v1(6070,4650) ; U43.28@6402.17,5383.15 6476.85,5383.15 6530,5330 v1(6530,5110)
  MidLayer1 w8: v1(6070,4650) v1(6530,5110)
FD9: U35.53 U43.27 | length 1440.1
  Top Layer w8: U35.53@5980,4295 6055,4295 6100,4340 v1(6100,4620) ; U43.27@6402.17,5363.46 6353.46,5363.46 6350,5360 6350,5340 6500,5190 v1(6500,5020)
  MidLayer1 w8: v1(6100,4620) v1(6500,5020)
FD10: U35.54 U43.32 | length 1856.5
  Top Layer w8: U35.54@5980,4270 6060,4270 6130,4340 v1(6130,4590) ; v1(6310,5490) 6338.11,5461.89 U43.32@6402.17,5461.89
  MidLayer1 w8: 6130,4610 v1(6130,4590) 6570,5030 6570,5410 6510,5470 6472.34,5470 6462.34,5460 6340,5460 v1(6310,5490)
FD11: U35.55 U43.30 | length 1639.5
  Top Layer w8: U35.55@5980,4245 6065,4245 6160,4340 v1(6160,4570) ; U43.30@6402.17,5422.52 6457.48,5422.52 6470,5410 6520,5410 v1(6600,5330)
  MidLayer1 w8: v1(6160,4570) 6160,4590 6507.87,4937.87 6527.87,4937.87 6600,5010 v1(6600,5330)
FD12: U35.56 U43.35 | length 1824.4
  Top Layer w8: U35.56@5980,4220 6080,4220 6180,4320 6180,4540 v1(6220,4580) ; U43.35@6410,5520 6480,5520 6510,5490 6510,5460 6570,5400 v1(6600,5400)
  MidLayer1 w8: v1(6220,4580) 6270,4580 6390,4700 6420,4700 6630,4910 6630,5370 v1(6600,5400)
FD13: U35.1 U43.36 | length 1630.2
  Top Layer w8: U35.1@6340,4220 v1(6480,4220) ; U43.36@6402.17,5540.63 6449.37,5540.63 6453.54,5536.46 6493.54,5536.46 6520,5510 6540,5510 v1(6570,5480)
  MidLayer2 w8: v1(6480,4220) 6530,4270 6530,4960 6570,5000 v1(6570,5480)
FD14: U35.2 U43.37 | length 1615.3
  Top Layer w8: U35.2@6340,4245 v1(6435,4245) ; U43.37@6402.17,5560.32 6489.69,5560.32 6500,5550 v1(6520,5550)
  MidLayer2 w8: v1(6435,4245) 6480,4290 6480,4950 6540,5010 6540,5040 6490,5090 6490,5250 6540,5300 6540,5530 v1(6520,5550)
FD15: U35.3 U43.34 | length 1569.7
  Top Layer w8: U35.3@6340,4270 v1(6400,4270) ; v1(6350,5490) 6361.26,5501.26 U43.34@6402.17,5501.26
  MidLayer2 w8: v1(6350,5490) 6380,5520 6470,5520 6520,5470 6520,5330 6460,5270 6460,4330 v1(6400,4270)
FDIN: U36.48 U38.1 | length 2632.5
  Top Layer w7: U38.1@6708.78,6395.16 6654.84,6395.16 6620,6430 6500,6430 6460,6390 6460,6240 6510,6190 6580,6190 6737.23,6032.77 6737.23,5802.77 6770,5770 6970,5770 7030,5830 v1(7030,5840) ; v1(7440,5630) 7530,5540 7530,5050 7490,5010 7490,4970 7503.15,4956.85 U36.48@7542.17,4956.85
  MidLayer1 w8: v1(7340,5730) v1(7440,5630)
  Bottom Layer w10: v1(7030,5840) 7130,5840 7240,5730 v1(7340,5730)
FINIT_B: R43.1 U36.42 U38.8 | length 2237.8
  Top Layer w7: R43.1@6540,6333.46 6600,6273.46 6600,6250 6633.98,6216.02 6783.98,6216.02 7010,5990 v1(7020,5990) ; v1(7430,4890) 7481.26,4838.74 U36.42@7542.17,4838.74
  MidLayer1 w8: v1(7290,5650) 7290,5350 7430,5210 v1(7430,4890)
  Bottom Layer w10: v1(7020,5990) 6950,5920 6950,5750 7050,5650 v1(7290,5650)